# Altium PCB sahand_khojasteh_ahmadi.PcbDoc
Units mm, origin at the board's own origin, x right, y up, seen from the top; angles counter-clockwise.
Board outline 92.71 x 56.01 mm, 2 copper layers (Top Layer, Bottom Layer); 29 components, 23 nets, 118 pads, 11 vias.
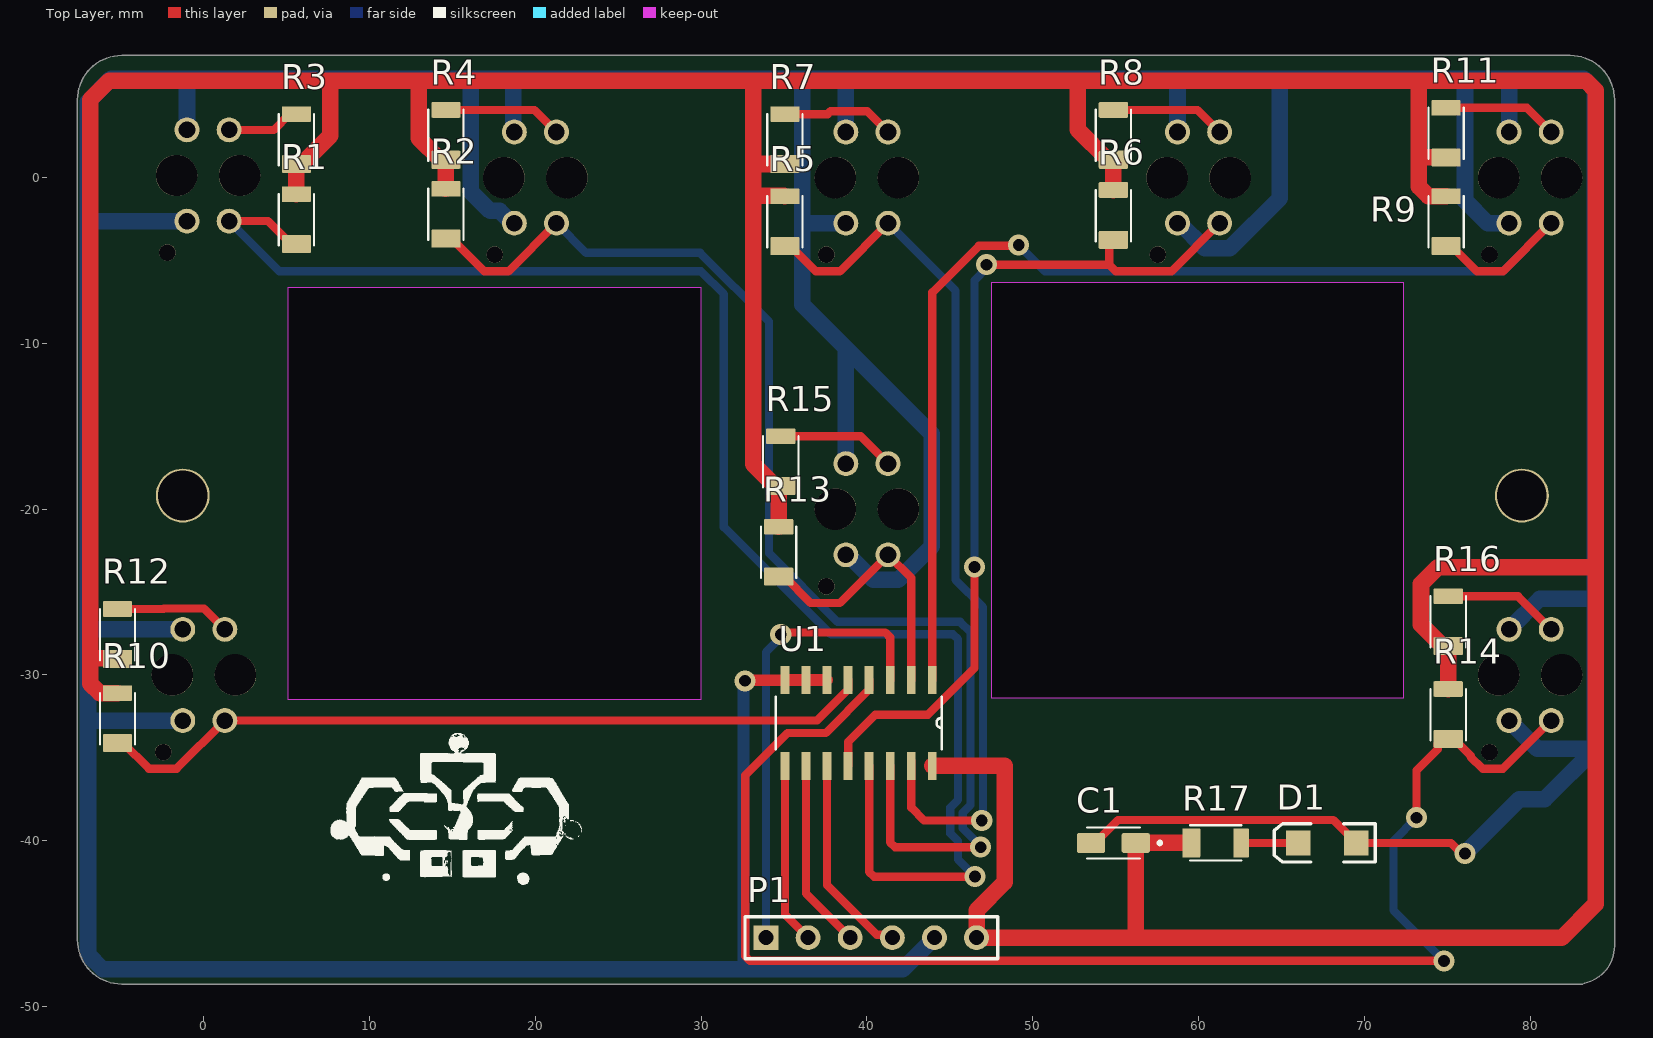
[diagram p0: Top Layer view]
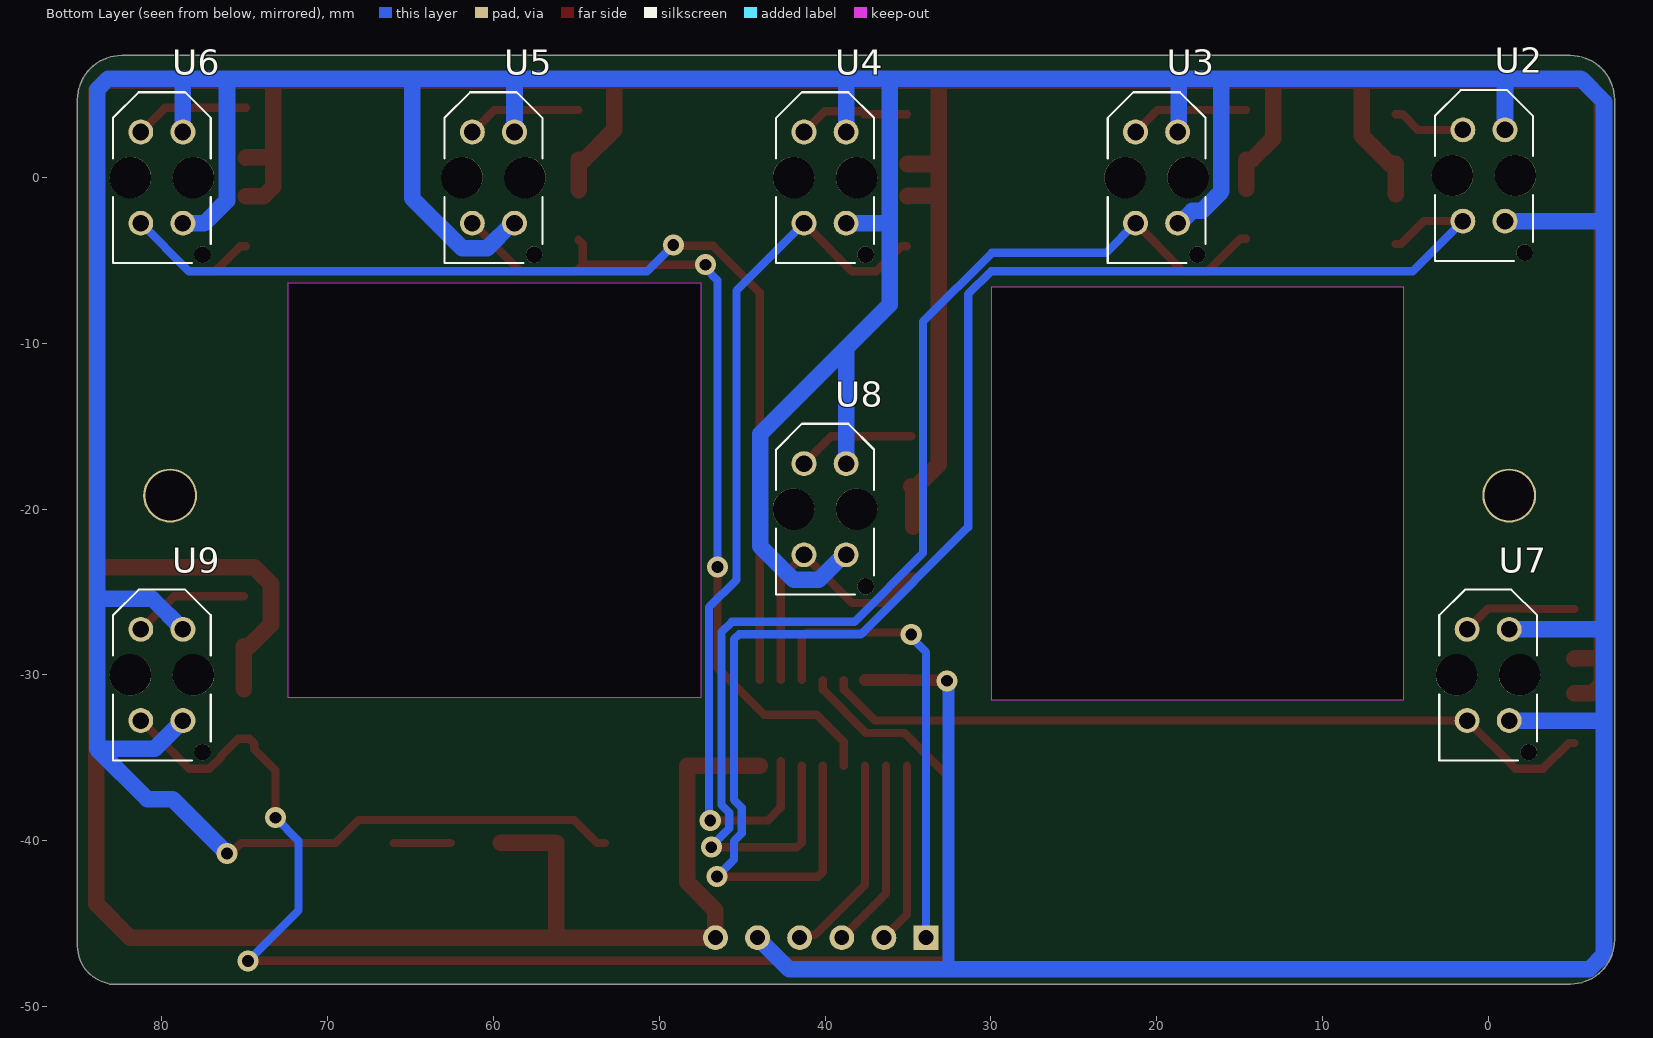
[diagram p1: Bottom Layer view, seen from below]
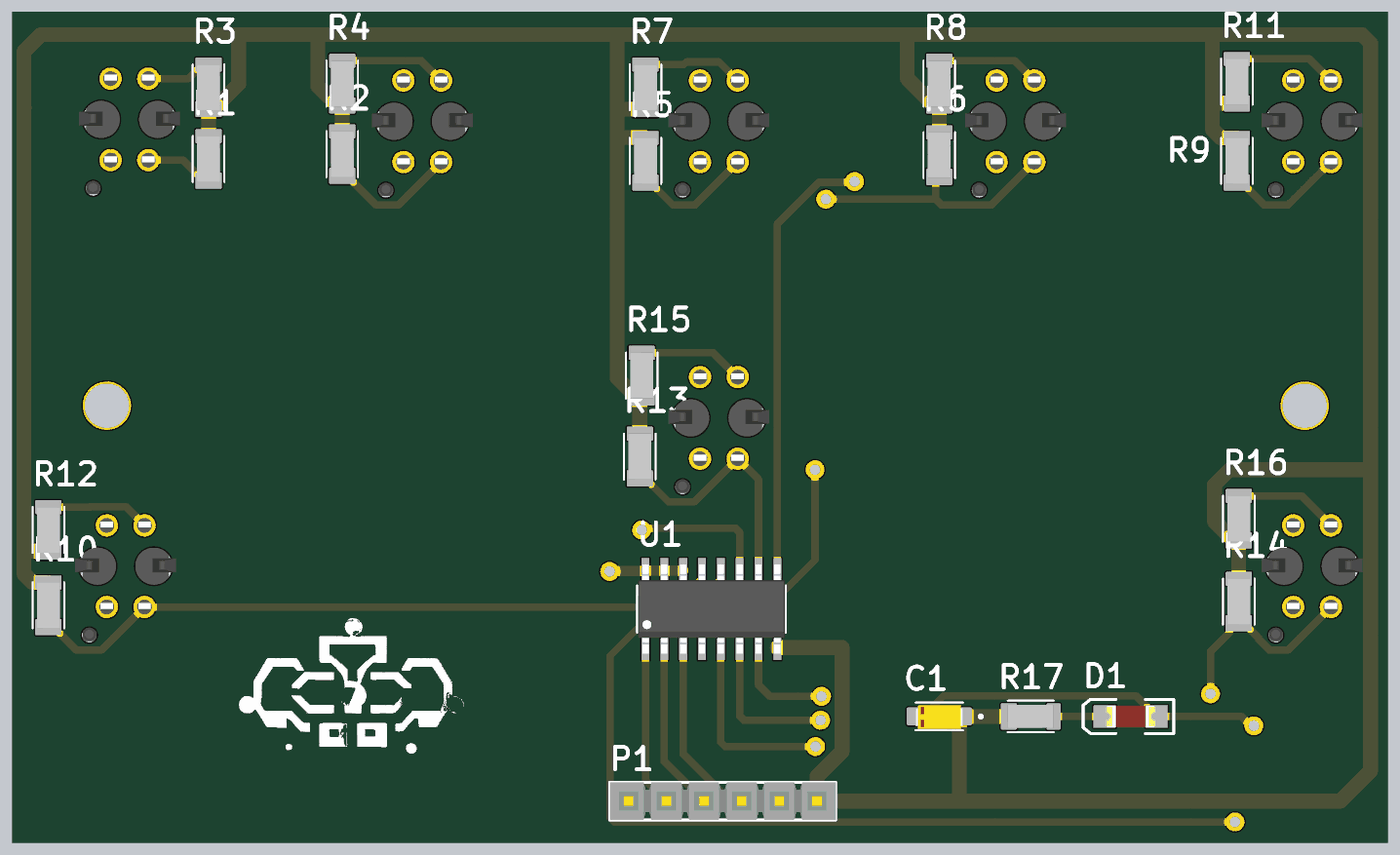
[diagram p2: 3D render of the assembled board from above, using the file's embedded part models]
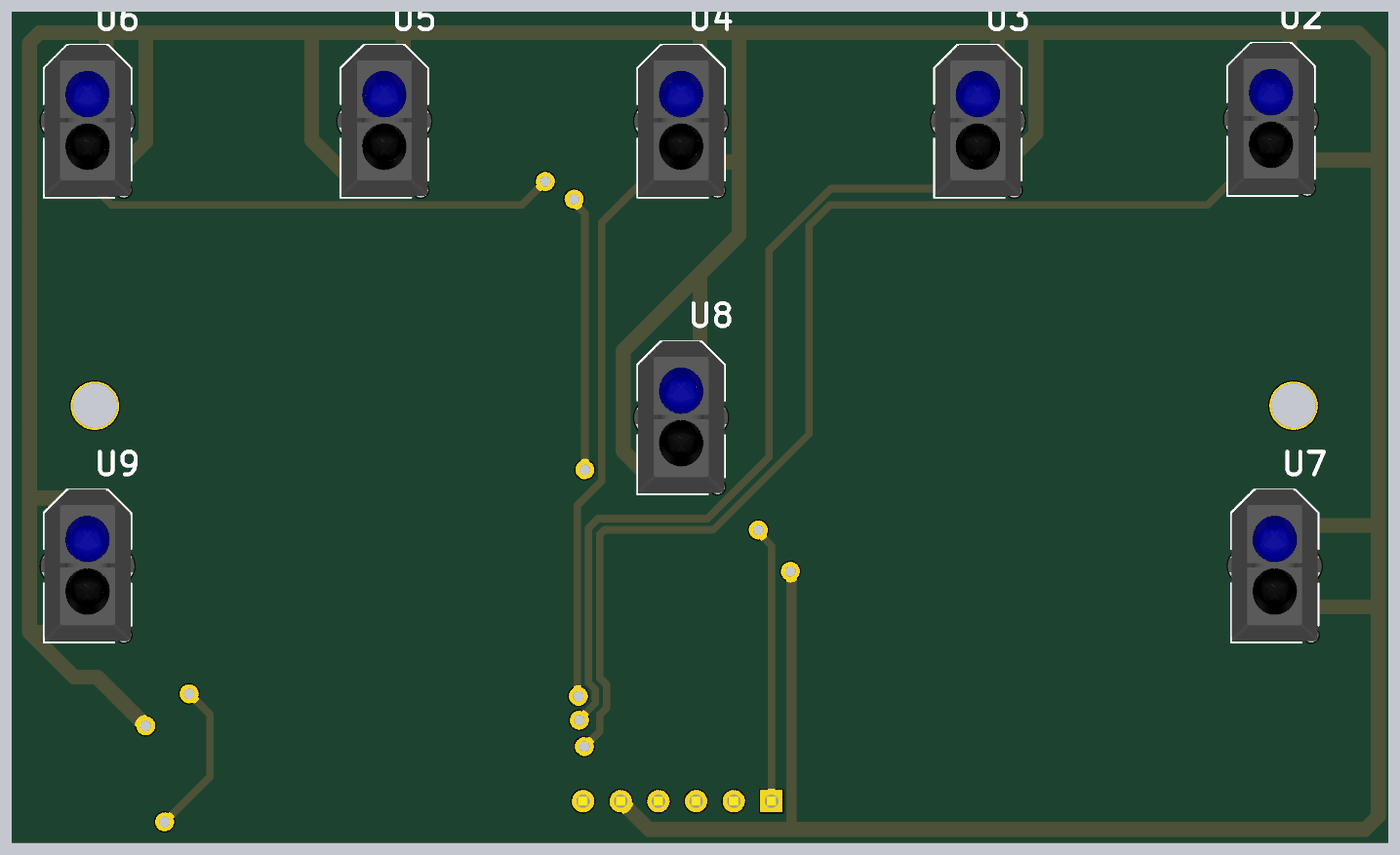
[diagram p3: 3D render of the assembled board from below, using the file's embedded part models]

## Layer stack, top to bottom
Top Solder: solder mask 0.0102, Solder Resist, Dk 3.5
Top Layer: signal copper 0.0356
Dielectric 1: dielectric 0.32, FR-4, Dk 4.8
Bottom Layer: signal copper 0.0356
Bottom Solder: solder mask 0.0102, Solder Resist, Dk 3.5

## Board outline
-7.62,-45.976 -7.62,4.699 cw(c-4.953,4.699) -4.955,7.366 -4.953,7.366 82.423,7.366 82.424,7.366 cw(c82.423,4.699) 85.09,4.699 85.09,-46.354 85.09,-46.355 cw(c82.804,-46.355) 83.287,-48.59 83.185,-48.641 82.803,-48.641 -4.952,-48.641 -4.953,-48.641 cw(c-4.953,-45.974)
cut-out: 47.498,-31.369 72.39,-31.369 72.39,-6.35 47.498,-6.35
cut-out: 5.08,-6.604 29.972,-6.604 29.972,-31.496 5.08,-31.496

## Design rules (kind name [scope] priority, off if disabled: settings)
Clearance [All] p1: gap=0.254 ignorepadtopadclearanceinfootprint=FALSE except(0: Arc-Hole Track-Hole SMDPad-Hole THPad-Hole Via-Hole Fill-Hole Poly-Hole Region-Hole Text-Hole)
PolygonConnect [All] p1: connectstyle=Relief reliefconductorwidth=0.254 reliefentries=4 polygonreliefangle="90 Angle" airgapwidth=0.254
RoutingVias [All] p1: holewidth=0.711 width=1.27 viastyle="Through Hole" minholewidth=0.711 minwidth=1.27 maxholewidth=0.711 maxwidth=1.27
SolderMaskExpansion [All] p1: expansion=0.102 istentingtop=FALSE
Width [All] p1: maxlimit=2 minlimit=0.5 preferedwidth=1 minimp=50.000000 maximp=50.000000 favimp=50.000000
30 further rules are at their usual default settings.

## Components (designator, comment, footprint, x,y, rotation, side; value= is the part's Value field where it differs from the comment)
C1 "" CAPMP3216X180N 54.864,-40.132 r180 top
D1 "SMD 1206 LED" "LED 1206" 67.764,-40.132 r180 top
P1 "Header 6" HDR1X6 33.909,-45.847 r0 top
R1 "1879462-3" RESC3115X65N 5.588,-2.54 r90 top
R2 "1879462-3" RESC3115X65N 14.605,-2.218 r90 top
R3 "1879462-3" RESC3115X65N 5.588,2.286 r90 top
R4 "1879462-3" RESC3115X65N 14.605,2.54 r90 top
R5 "1879462-3" RESC3115X65N 35.052,-2.667 r90 top
R6 "1879462-3" RESC3115X65N 54.864,-2.286 r90 top
R7 "1879462-3" RESC3115X65N 35.052,2.286 r90 top
R8 "1879462-3" RESC3115X65N 54.864,2.54 r90 top
R9 "1879462-3" RESC3115X65N 74.93,-2.667 r90 top
R10 "1879462-3" RESC3115X65N -5.207,-32.639 r90 top
R11 "1879462-3" RESC3115X65N 74.93,2.667 r90 top
R12 "1879462-3" RESC3115X65N -5.207,-27.559 r90 top
R13 "1879462-3" RESC3115X65N 34.671,-22.606 r90 top
R14 "1879462-3" RESC3115X65N 75.057,-32.385 r90 top
R15 "1879462-3" RESC3115X65N 34.798,-17.145 r90 top
R16 "1879462-3" RESC3115X65N 75.057,-26.797 r90 top
R17 "1879462-3" RESC3115X65N 61.028,-40.132 r0 top
U1 "74HC4051D" SOIC127P600X175-16N 39.497,-32.893 r270 top
U2 "TCRT5000" OPTO_TCRT5000 0.254,0.127 r90 bottom
U3 "TCRT5000" OPTO_TCRT5000 20,0 r90 bottom
U4 "TCRT5000" OPTO_TCRT5000 40,0 r90 bottom
U5 "TCRT5000" OPTO_TCRT5000 60,0 r90 bottom
U6 "TCRT5000" OPTO_TCRT5000 80,0 r90 bottom
U7 "TCRT5000" OPTO_TCRT5000 0,-30 r90 bottom
U8 "TCRT5000" OPTO_TCRT5000 40,-20 r90 bottom
U9 "TCRT5000" OPTO_TCRT5000 80,-30 r90 bottom

## Footprints (in the part's own frame and the unit in brackets; to place one, negate y for a bottom-side part, rotate by r counter-clockwise, add the part's x,y. Pads: shape width x height; smd on the part's side, far side on the other; paste and mask are expansions set on the pad)
CAPMP3216X180N [mm]
  rrect25% 1.71x1.23 smd: 1(-1.35,0) 2(1.35,0)
  silkscreen extent -2.9,-0.93 1.6,0.93, body extent -1.6,-0.76 1.6,0.84, height 1.75
HDR1X6 [mm] "Connector; Header; 6 Position"
  rect 1.5x1.5 hole 0.9: 1(0,0)
  round 1.5 hole 0.9: 2(2.54,0) 3(5.08,0) 4(7.62,0) 5(10.16,0) 6(12.7,0)
  silkscreen extent -1.27,-1.27 13.97,1.27, body extent -1.26,-1.25 13.98,1.29, height 8.38
"LED 1206" [mm]
  rect 1.5x1.5 smd: 1(-1.75,0) 2(1.75,0)
  silkscreen extent -2.9,-1.15 3.2,1.15, body extent -1.65,-0.72 1.65,0.73, height 1.36
OPTO_TCRT5000 [mm]
  round 1.5 hole 1: A(2.75,1.27) CATH(2.75,-1.27) COLL(-2.75,1.27) E(-2.75,-1.27)
  round 1 hole 1 unplated: ""(-4.65,-2.45)
  round 2.5 hole 2.5 unplated: ""(0,-1.9) ""(0,1.9)
  silkscreen extent -5.15,-2.95 5.15,2.95, body extent -5.04,-3.4 5.16,3.4, height 7.2
RESC3115X65N [mm]
  rrect14% 1.09x1.77 smd: 1(-1.465,0)
  rrect14% 0.94x1.77 smd: 2(1.54,0)
  silkscreen extent -1.55,-1.06 1.55,1.06, body extent -1.55,-0.77 1.55,0.77, height 0.53
SOIC127P600X175-16N [mil]
  rect 67x21 smd: 1(-102,175) 2(-102,125) 3(-102,75) 4(-102,25) 5(-102,-25) 6(-102,-75) 7(-102,-125) 8(-102,-175) 9(102,-175) 10(102,-125) 11(102,-75) 12(102,-25) 13(102,25) 14(102,75) 15(102,125) 16(102,175)
  silkscreen extent -62,-197 62,197, body extent -118,-195 118,195, height 67

## Part data
C1: library part T491A475K010AT, "4.7ÂµF Molded Tantalum Capacitors 10V 1206 (3216 Metric) 5Ohm", Package="1206 AVX Corporation", Availability=Good, Check_prices=https://www.snapeda.com/parts/T491A475K010AT/KEMET/view-part/2752223/?ref=eda, MF=KEMET, MP=T491A475K010AT, Price=None, Purchase-URL=https://pricing.snapeda.com/search/part/T491A475K010AT/?ref=eda, SnapEDA_Link=https://www.snapeda.com/parts/T491A475K010AT/KEMET/view-part/2752223/?ref=snap
D1: library part "LED SMD 1206"
P1: "Header, 6-Pin", LatestRevisionDate=17-Jul-2002, LatestRevisionNote="Re-released for DXP Platform.", Publisher="Altium Limited"
R1 R2 R3 R4 R5 R6 R7 R8 R9 R10 R11 R12 R13 R14 R15 R16 R17: "RL73H 2B R12 1% 5K RL", Package=None, Availability=Unavailable, MP=1879462-3, Price=None
U1: "1 Circuit IC Switch 8:1 130Ohm 16-SOIC", Package="SOIC-16 Toshiba", Availability="In Stock", Check_prices=https://www.snapeda.com/parts/74HC4051D/Toshiba/view-part/?ref=eda, MF=Toshiba, MP=74HC4051D, Price=None, Purchase-URL=https://pricing.snapeda.com/search/part/74HC4051D/?ref=eda, SnapEDA_Link=https://www.snapeda.com/parts/74HC4051D/Toshiba/view-part/?ref=snap
U2 U3 U4 U5 U6 U7 U8 U9: "950 nm 60 mA Through Hole Reflective Optical Sensor with Transistor Output", Package=None, Availability=Unavailable, MP=TCRT5000, Price=None

## Free pads (board coordinates)
  round 3.25 hole 3: 2(-1.27,-19.177) 3(79.502,-19.177)

## Via types
v1: diameter 1.27, hole 0.711, Top Layer to Bottom Layer, 11 vias

## Nets (pads, with @x,y where several pads share a name; then routed paths per layer and width w, separated by ;. In a path a pad name is that pad's centre, name@x,y a point inside that pad or via, vN(x,y) a via of type N, cw(c..) or ccw(c..) an arc to the next point about the centre after c; other vN are vias at no path point)
4: P1.4 U1.11 | length 12.4
  Top Layer w0.5: U1.11 37.592,-42.677 40.508,-45.593 40.513,-45.593 40.587,-45.667 41.349,-45.667 P1.4
5: P1.3 U1.10 | length 11.5
  Top Layer w0.5: U1.10 36.322,-43.18 P1.3
6: P1.2 U1.9 | length 10.9
  Top Layer w0.5: U1.9 35.052,-44.45 P1.2
+5: C1.1 P1.6 R1.2 R2.2 R3.1 R4.1 R5.2 R6.2 R7.1 R8.1 R9.2 R10.2 R11.1 R12.1 R13.2 R14.2 R15.1 R16.1 R17.1 U1.16 | length 324.9
  Top Layer w1: -6.844,0.903 -6.858,0.889 ; R10.2 -6.272,-31.099 -6.858,-30.513 -6.858,-28.702 ; R12.1 -5.252,-28.979 -6.581,-28.979 -6.858,-28.702 ; R1.2 R3.1 5.928,0.821 7.62,2.513 7.62,5.842 ; R2.2 R4.1 14.265,1.075 12.954,2.386 12.954,5.842 ; R13.2 34.671,-18.655 R15.1@34.626,-18.61 ; R15.1 R15.1@34.626,-18.61 ; R5.2 35.022,-1.097 33.228,-1.097 33.147,-1.016 ; R7.1 33.206,0.821 33.147,0.762 ; U1.16 48.26,-35.484 ; 48.311,-35.484 48.311,-42.494 46.609,-44.196 P1.6 56.134,-45.847 ; R6.2 R8.1@54.864,1.03 ; R8.1 54.524,1.075 52.705,2.894 52.705,5.842 ; R17.1 C1.1 56.214,-45.767 56.134,-45.847 ; 73.279,1.397 73.449,1.227 74.905,1.227 R11.1 ; R9.2 73.865,-1.127 73.279,-0.541 73.279,5.842 ; R14.2 R16.1 74.717,-28.262 73.418,-26.963 73.418,-24.513 74.436,-23.495 83.947,-23.495 ; -6.858,-28.702 -6.858,0.889 ; -6.858,0.889 -6.858,4.699 -5.715,5.842 7.62,5.842 ; 7.62,5.842 12.954,5.842 ; 12.954,5.842 33.147,5.842 ; 33.147,-1.016 33.147,0.762 ; 33.147,-1.016 33.147,-17.299 34.458,-18.61 R15.1@34.626,-18.61 ; 33.147,0.762 33.147,5.842 ; 33.147,5.842 52.705,5.842 ; 52.705,5.842 73.279,5.842 ; 56.134,-45.847 81.915,-45.847 83.947,-43.815 83.947,-23.495 ; 73.279,5.842 83.361,5.842 83.947,5.256 83.947,-23.495
A0: P1.1 U1.3 | length 28
  Top Layer w0.5: v1(34.798,-27.559) 34.925,-27.432 41.109,-27.432 41.402,-27.725 U1.3
  Bottom Layer w0.5: P1.1 33.909,-28.629 34.798,-27.74 v1(34.798,-27.559)
GND: C1.2 D1.1 P1.5 U1.6 U1.7 U1.8 U2.CATH U2.E U3.CATH U3.E U4.CATH U4.E U5.CATH U5.E U6.CATH U6.E U7.CATH U7.E U8.CATH U8.E U9.CATH U9.E | length 422.2
  Top Layer w0.5: C1.2@53.274,-40.132 C1.2 53.754,-40.132 55.143,-38.743 68.125,-38.743 D1.1 75.23,-40.132 75.865,-40.767 v1(76.073,-40.767)
  Top Layer w0.7: v1(32.639,-30.353) 32.664,-30.328 35.027,-30.328 U1.8 U1.7 U1.6
  Bottom Layer w0.7: 32.639,-47.752 32.555,-47.668 32.555,-30.437 v1(32.639,-30.353)
  Bottom Layer w1: U7.E -6.969,-32.75 -6.985,-32.766 ; U7.CATH -6.913,-27.25 -6.985,-27.178 ; U2.E -6.941,-2.623 -6.985,-2.667 ; U2.CATH -1.016,5.969 ; U3.E 18.595,-2.75 17.849,-2.004 17.27,-2.004 16.096,-0.83 16.096,5.936 16.129,5.969 ; U3.CATH 18.669,2.811 18.669,5.969 ; U8.E@38.64,-22.75 U8.E 38.865,-22.75 40.369,-24.254 41.893,-24.254 43.904,-22.243 43.904,-15.463 38.73,-10.289 ; U8.CATH@38.64,-17.25 U8.CATH 38.73,-10.289 ; U4.E 36.096,-2.75 ; U4.CATH 38.73,5.964 38.735,5.969 ; P1.5@44.069,-45.712 P1.5 42.164,-47.752 32.639,-47.752 -6.096,-47.752 -6.985,-46.863 -6.985,-32.766 ; U5.E@58.595,-2.75 U5.E 58.865,-2.75 60.369,-4.254 61.893,-4.254 64.897,-1.25 64.897,5.969 ; U5.CATH 58.73,5.771 58.928,5.969 ; v1(76.073,-40.767) 79.355,-37.485 80.879,-37.485 83.904,-34.46 ; U9.CATH 80.58,-25.4 83.904,-25.4 ; U6.E 77.437,-2.75 76.073,-1.386 76.073,5.969 ; U6.CATH 78.73,5.688 79.011,5.969 ; U9.E@78.865,-32.75 U9.E 80.44,-34.46 83.904,-34.46 ; -6.985,-32.766 -6.985,-27.178 ; -6.985,-27.178 -6.985,-2.667 ; -6.985,-2.667 -6.985,4.572 -5.588,5.969 -1.016,5.969 ; -1.016,5.969 16.129,5.969 ; 16.129,5.969 18.669,5.969 ; 18.669,5.969 36.449,5.969 ; 36.096,-2.75 36.096,5.616 36.449,5.969 ; 36.096,-2.75 36.096,-7.655 38.73,-10.289 ; 36.449,5.969 38.735,5.969 ; 38.735,5.969 58.928,5.969 ; 58.928,5.969 64.897,5.969 ; 64.897,5.969 76.073,5.969 ; 76.073,5.969 79.011,5.969 ; 79.011,5.969 83.234,5.969 83.904,5.299 83.904,-5.207 83.904,-25.4 ; 83.904,-34.46 83.904,-25.4
NetD1_2: D1.2 R17.2 | length 3.4
  Top Layer w0.5: R17.2 D1.2
NetR3_2: R3.2 U2.A | length 4.5
  Top Layer w0.5: U2.A 4.224,2.877 5.173,3.826 R3.2
NetR4_2: R4.2 U3.A | length 7.2
  Top Layer w0.5: R4.2 19.94,4.08 U3.A
NetR7_2: R7.2 U4.A | length 6.8
  Top Layer w0.5: R7.2 37.627,3.826 37.805,4.004 40.016,4.004 U4.A
NetR8_2: R8.2 U5.A | length 7
  Top Layer w0.5: R8.2 59.94,4.08 U5.A
NetR11_2: R11.2 U6.A | length 6.9
  Top Layer w0.5: R11.2 79.813,4.207 U6.A
NetR12_2: R12.2 U7.A | length 7
  Top Layer w0.5: R12.2 -2.425,-26.019 -2.402,-25.996 0.016,-25.996 U7.A
NetR15_2: R15.2 U8.A | length 7.2
  Top Layer w0.5: R15.2 39.625,-15.605 U8.A
NetR16_2: R16.2 U9.A | length 7
  Top Layer w0.5: R16.2 79.277,-25.257 U9.A
O1: R1.1 U1.13 U2.COLL | length 95.3
  Top Layer w0.5: U2.COLL 3.866,-2.623 5.248,-4.005 R1.1 ; U1.13 40.132,-41.871 40.425,-42.164 v1(46.521,-42.164)
  Bottom Layer w0.5: U2.COLL 4.555,-5.654 29.989,-5.654 31.369,-7.034 31.369,-21.082 37.838,-27.551 45.193,-27.551 45.486,-27.844 45.486,-37.534 45.029,-37.991 45.029,-39.559 45.486,-40.017 45.486,-41.129 v1(46.521,-42.164)
O2: R2.1 U1.14 U3.COLL | length 75.9
  Top Layer w0.5: R2.1 14.945,-3.683 16.916,-5.654 18.366,-5.654 U3.COLL ; U1.14 41.402,-40.093 41.695,-40.386 v1(46.859,-40.386)
  Bottom Layer w0.5: U3.COLL 23.061,-4.541 29.942,-4.541 34.085,-8.684 34.085,-22.655 38.227,-26.797 45.624,-26.797 46.24,-27.413 46.24,-37.846 45.783,-38.303 45.783,-39.247 46.859,-40.323 v1(46.859,-40.386)
O3: R5.1 U1.15 U4.COLL | length 53.9
  Top Layer w0.5: R5.1 35.392,-4.132 36.914,-5.654 38.366,-5.654 U4.COLL ; U1.15@42.672,-35.194 42.672,-38.004 43.443,-38.775 v1(46.922,-38.775)
  Bottom Layer w0.5: U4.COLL 45.339,-6.819 45.339,-24.257 46.994,-25.912 46.994,-38.703 v1(46.922,-38.775)
O4: R6.1 U1.12 U5.COLL | length 52.6
  Top Layer w0.5: U1.12 38.862,-34.036 40.502,-32.396 43.679,-32.396 46.482,-29.593 v1(46.482,-23.495) ; v1(47.217,-5.253) 54.61,-5.253 ; R6.1 54.61,-4.005 54.61,-5.253 ; U5.COLL 58.366,-5.654 55.011,-5.654 54.61,-5.253
  Bottom Layer w0.5: v1(46.482,-23.495) 46.482,-6.196 47.217,-5.461 v1(47.217,-5.253)
O5: R9.1 U1.1 U6.COLL | length 71.9
  Top Layer w0.5: U1.1 43.942,-6.917 46.745,-4.114 49.099,-4.114 v1(49.149,-4.064) ; R9.1 75.27,-4.132 76.792,-5.654 78.366,-5.654 U6.COLL
  Bottom Layer w0.5: v1(49.149,-4.064) 50.739,-5.654 78.366,-5.654 U6.COLL
O6: R10.1 U1.5 U7.COLL | length 47.3
  Top Layer w0.5: R10.1 -4.867,-34.104 -3.317,-35.654 -1.634,-35.654 U7.COLL 36.998,-32.75 38.862,-30.886 U1.5
O7: R13.1 U1.2 U8.COLL | length 16.6
  Top Layer w0.5: R13.1 35.011,-24.071 36.594,-25.654 38.366,-25.654 U8.COLL 42.672,-24.152 U1.2
O8: R14.1 U1.4 U9.COLL | length 87.8
  Top Layer w0.5: U1.4 40.132,-30.886 37.514,-33.504 35.203,-33.504 34.578,-34.129 34.577,-34.129 34.281,-34.424 34.281,-34.426 32.655,-36.052 32.655,-46.951 32.948,-47.244 v1(74.803,-47.244) ; v1(73.152,-38.608) 73.152,-35.755 74.422,-34.485 74.422,-34.145 74.717,-33.85 R14.1 75.397,-33.85 76.413,-34.866 76.413,-34.933 77.134,-35.654 78.366,-35.654 U9.COLL
  Bottom Layer w0.5: v1(73.152,-38.608) 71.755,-40.005 71.755,-44.196 v1(74.803,-47.244)
pads on no net: U2. U3. U4. U5. U6. U7. U8. U9.

## Silkscreen, mask and mechanical layers (free items; w line width, h text height)
Top Overlay:
  drawing of 27 lines, arcs and shapes, not listed
Mechanical 1:
  lines w0.254: 82.804,-48.514 ccw(c82.804,-46.355) 84.963,-46.355 84.963,4.699 ccw(c82.423,4.699) 82.423,7.239 -4.953,7.239 ccw(c-4.953,4.699) -7.493,4.699 -7.493,-45.974 ccw(c-4.953,-45.974) -4.953,-48.514 83.185,-48.514 ; 5.08,-31.496 5.08,-6.731 5.08,-6.477 5.334,-6.477 29.972,-6.477 29.972,-31.496 5.08,-31.496 ; 5.08,-31.369 29.972,-31.369 29.972,-6.35 5.334,-6.35 5.08,-6.35 5.08,-6.604 5.08,-31.369 ; 47.498,-31.369 72.39,-31.369 72.39,-6.35 47.752,-6.35 47.498,-6.35 47.498,-6.604 47.498,-31.369 ; 47.498,-31.242 47.498,-6.477 47.498,-6.223 47.752,-6.223 72.39,-6.223 72.39,-31.242 47.498,-31.242